# Altium PCB MCORD_MCX_SAS.PcbDoc
Units mil, origin at the board's own origin, x right, y up, seen from the top; angles counter-clockwise.
Board outline 9527.56 x 1968.5 mil, 4 copper layers (TOP, G1, PWR, BOT), stack 61.811 mil thick; 35 components, 33 nets, 222 pads, 49 vias.
Unrouted connection lines stored in the file: 1.
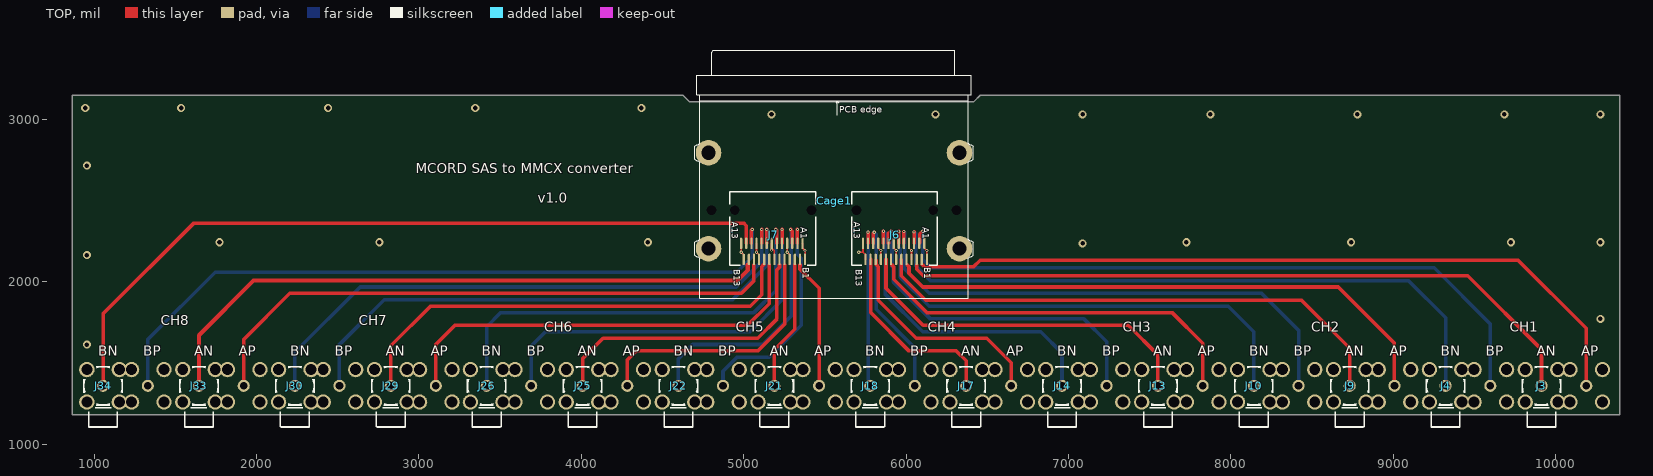
[diagram p0: TOP view]
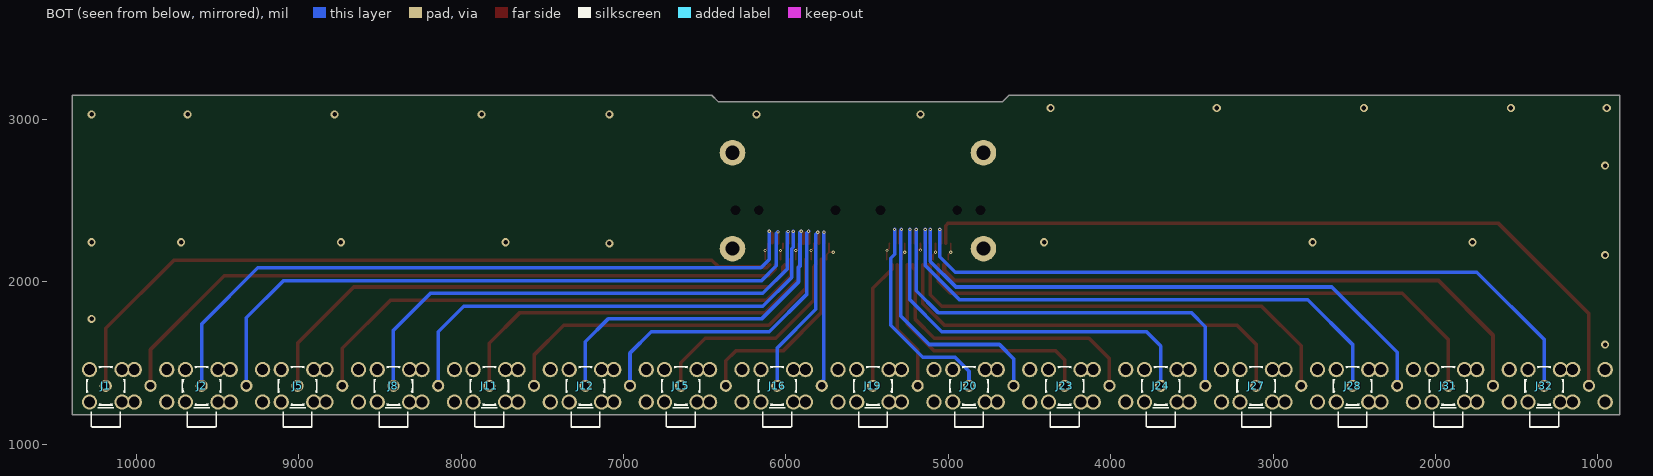
[diagram p1: BOT view, seen from below]
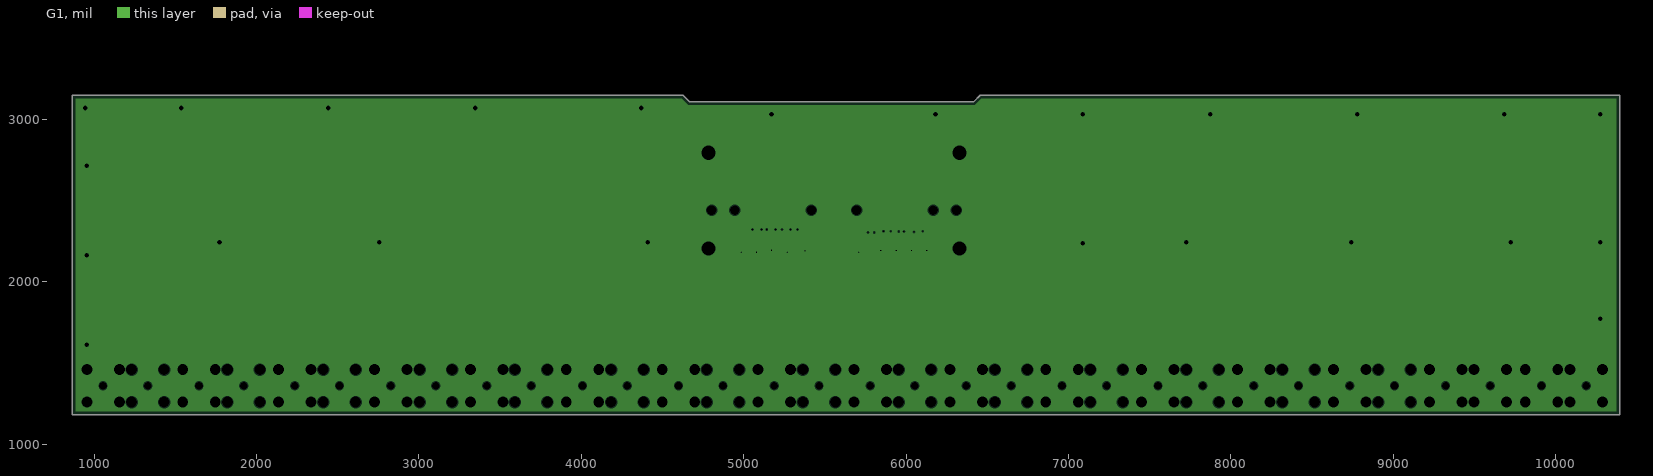
[diagram p2: G1, clearances drawn from the general rule]
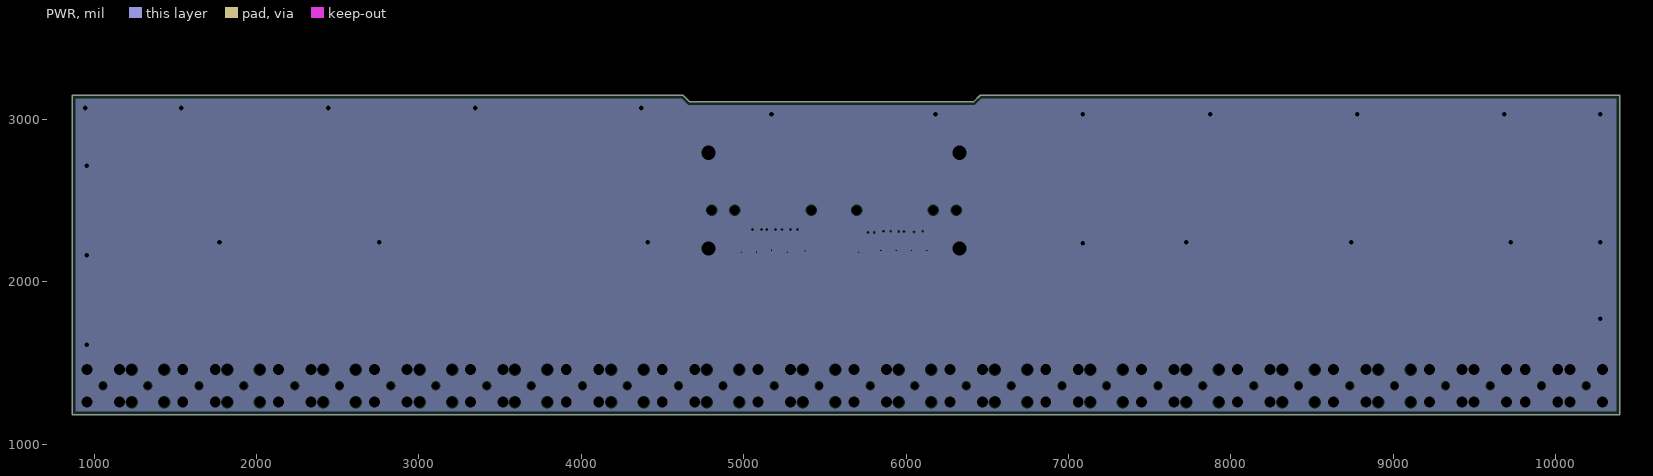
[diagram p3: PWR, clearances drawn from the general rule]
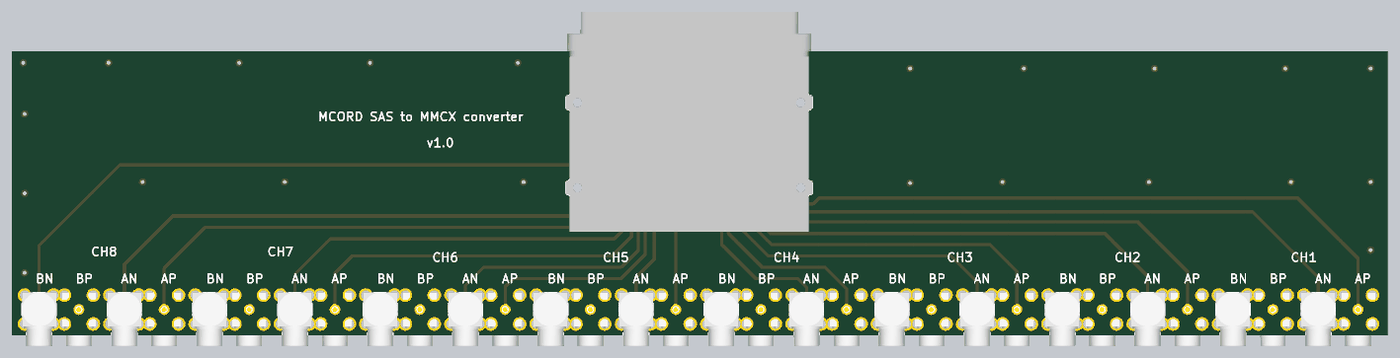
[diagram p4: 3D render of the assembled board from above, using the file's embedded part models]
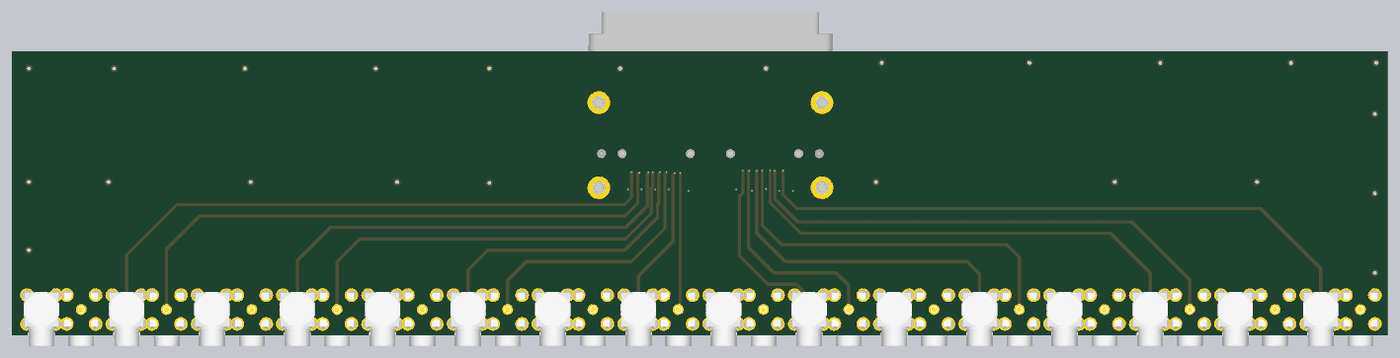
[diagram p5: 3D render of the assembled board from below, using the file's embedded part models]

## Layer stack, top to bottom
TopSolder: solder mask 0.394, Solder Resist, Dk 3.5
TOP: signal copper 1.378
Dielectric1: prepreg 14.1732, PP-015, Dk 4.3
G1: plane copper 1.378, net GND
Dielectric2: core 27.9528, Core-042, Dk 4.3
PWR: plane copper 1.378, net GND
Dielectric3: prepreg 14.1732, PP-015, Dk 4.3
BOT: signal copper 1.378
BottomSolder: solder mask 0.394, Solder Resist, Dk 3.5

## Board outline
866.14,1181.1 866.14,3149.61 4625.57,3149.61 4664.94,3110.24 6417.32,3110.24 6456.69,3149.61 10393.7,3149.61 10393.7,1181.1

## Design rules (kind name [scope] priority, off if disabled: settings)
AcuteAngle [All] p1: minimum=6.00000000000000E+0001 checktracksonly=FALSE
Clearance [All] p1: gap=5 ignorepadtopadclearanceinfootprint=FALSE
ComponentClearance [All] p1 off: gap=10 collisioncheckmode=3 verticalgap=10 showdistances=FALSE
DiffPairsRouting [All] p1: maxlimit=6 minlimit=6 mostfreqgap=6 toplayer_minwidth=10 toplayer_maxwidth=10 toplayer_prefwidth=10 bottomlayer_minwidth=10 bottomlayer_maxwidth=10 bottomlayer_prefwidth=10 impedanceprofiledriven=TRUE impedanceprofileid={2FF3B780-2FCA-48EA-8E76-FBA2A5B136F6} impedanceprofilevalue=100.000000 maxuncoupledlength=500
Height [All] p1 off: minheight=0 maxheight=5000 prefheight=500
HoleSize [All] p1: absolutevalues=TRUE maxlimit=157.48 minlimit=1 maxpercent=80.000 minpercent=20.000
MinimumSolderMaskSliver [All] p1: minsoldermaskwidth=1
PlaneClearance [All] p1: clearance=5
PlaneConnect [All] p1: pad.planeconnectstyle=Relief pad.reliefexpansion=5 pad.reliefentries=4 pad.reliefconductorwidth=5 pad.reliefairgap=5 via.planeconnectstyle=Direct via.reliefexpansion=20 via.reliefentries=4 via.reliefconductorwidth=10 via.reliefairgap=10
PolygonConnect [All] p1: thpad.connectstyle=Relief thpad.reliefconductorwidth=5 thpad.reliefentries=4 thpad.polygonreliefangle="90 Angle" thpad.airgapwidth=5 smdpad.connectstyle=Relief smdpad.reliefconductorwidth=5 smdpad.reliefentries=4 smdpad.polygonreliefangle="90 Angle" smdpad.airgapwidth=5 via.connectstyle=Direct via.reliefconductorwidth=10 via.reliefentries=4 via.polygonreliefangle="90 Angle" via.airgapwidth=10
RoomDefinition MCORD_MCX_SAS [InComponentClass('MCORD_MCX_SAS')] p1 off: confinementstyle=ConfineIn formatcopy=TRUE lockcomponents=FALSE outline 2440.94,2007.87 2777.17,2007.87 2777.17,2244.09 2440.94,2244.09
RoutingVias [All] p1: holewidth=7.87 width=19.68 viastyle="Through Hole" minholewidth=7.87 minwidth=19.68 maxholewidth=28 maxwidth=50 viatemplateguid#1={D7F82552-14B3-4ECA-8CF9-3B28E7AADB91} viatemplatename#1=v50h20m0mx0
SilkToSilkClearance [All] p1: silktosilkclearance=0
SilkToSolderMaskClearance [IsPad] p1: minsilkscreentomaskgap=0 clearancetoexposedcopper=TRUE
SolderMaskExpansion [All] p1: expansion=2 istentingtop=FALSE
Width "Width 50R" [InNetClass('50R')] p1: maxlimit=26 minlimit=22 preferedwidth=25.94 impedanceprofiledriven=TRUE impedanceprofileid={70AC7992-8569-4CAB-A508-E77900784CB2} impedanceprofilevalue=50.000000 minimp=50.000000 maximp=50.000000 favimp=50.000000
Width [All] p2: maxlimit=100 minlimit=6 preferedwidth=10
21 further rules are at their usual default settings.

## Classes and differential pairs
net class 50R: OUTA_N1 OUTA_N2 OUTA_N3 OUTA_N4 OUTA_N5 OUTA_N6 OUTA_N7 OUTA_N8 OUTA_P1 OUTA_P2 OUTA_P3 OUTA_P4 OUTA_P5 OUTA_P6 OUTA_P7 OUTA_P8 OUTB_N1 OUTB_N2 OUTB_N3 OUTB_N4 OUTB_N5 OUTB_N6 OUTB_N7 OUTB_N8 OUTB_P1 OUTB_P2 OUTB_P3 OUTB_P4 OUTB_P5 OUTB_P6 OUTB_P7 OUTB_P8

## Components (designator, comment, footprint, x,y, rotation, side; value= is the part's Value field where it differs from the comment)
Cage1 "Mini-SAS" TYCO_1888321-2 4802.17,2440.94 r270 top
J1 "MCX" AMPHENOL_919-383J-51A 10188.61,1359.84 r270 bottom
J2 "MCX" AMPHENOL_919-383J-51A 9598.06,1359.84 r270 bottom
J3 "MCX" AMPHENOL_919-383J-51A 9913.02,1359.84 r270 top
J4 "MCX" AMPHENOL_919-383J-51A 9322.47,1359.84 r270 top
J5 "MCX" AMPHENOL_919-383J-51A 9007.51,1359.84 r270 bottom
J6 "Mini-SAS" TYCO_1761987-7 5694.95,2440.94 r270 top
J7 "Mini-SAS" TYCO_1761987-7 4944.88,2440.94 r270 top
J8 "MCX" AMPHENOL_919-383J-51A 8416.96,1359.84 r270 bottom
J9 "MCX" AMPHENOL_919-383J-51A 8731.92,1359.84 r270 top
J10 "MCX" AMPHENOL_919-383J-51A 8141.37,1359.84 r270 top
J11 "MCX" AMPHENOL_919-383J-51A 7826.41,1359.84 r270 bottom
J12 "MCX" AMPHENOL_919-383J-51A 7234.74,1359.84 r270 bottom
J13 "MCX" AMPHENOL_919-383J-51A 7550.82,1359.84 r270 top
J14 "MCX" AMPHENOL_919-383J-51A 6960.27,1359.84 r270 top
J15 "MCX" AMPHENOL_919-383J-51A 6647.33,1359.84 r270 bottom
J16 "MCX" AMPHENOL_919-383J-51A 6053.63,1359.84 r270 bottom
J17 "MCX" AMPHENOL_919-383J-51A 6369.72,1359.84 r270 top
J18 "MCX" AMPHENOL_919-383J-51A 5779.17,1359.84 r270 top
J19 "MCX" AMPHENOL_919-383J-51A 5464.2,1359.84 r270 bottom
J20 "MCX" AMPHENOL_919-383J-51A 4872.53,1359.84 r270 bottom
J21 "MCX" AMPHENOL_919-383J-51A 5188.61,1359.84 r270 top
J22 "MCX" AMPHENOL_919-383J-51A 4598.06,1359.84 r270 top
J23 "MCX" AMPHENOL_919-383J-51A 4283.1,1359.84 r270 bottom
J24 "MCX" AMPHENOL_919-383J-51A 3691.43,1359.84 r270 bottom
J25 "MCX" AMPHENOL_919-383J-51A 4007.51,1359.84 r270 top
J26 "MCX" AMPHENOL_919-383J-51A 3416.96,1359.84 r270 top
J27 "MCX" AMPHENOL_919-383J-51A 3104.03,1359.84 r270 bottom
J28 "MCX" AMPHENOL_919-383J-51A 2510.33,1359.84 r270 bottom
J29 "MCX" AMPHENOL_919-383J-51A 2826.41,1359.84 r270 top
J30 "MCX" AMPHENOL_919-383J-51A 2235.86,1359.84 r270 top
J31 "MCX" AMPHENOL_919-383J-51A 1920.9,1359.84 r270 bottom
J32 "MCX" AMPHENOL_919-383J-51A 1330.35,1359.84 r270 bottom
J33 "MCX" AMPHENOL_919-383J-51A 1645.31,1359.84 r270 top
J34 "MCX" AMPHENOL_919-383J-51A 1054.76,1359.84 r270 top

## Footprints (in the part's own frame and the unit in brackets; to place one, negate y for a bottom-side part, rotate by r counter-clockwise, add the part's x,y. Pads: shape width x height; smd on the part's side, far side on the other; paste and mask are expansions set on the pad)
AMPHENOL_919-383J-51A [mm] "50 Ohm, RF Connector, MCX Right Angle PCB Receptacle Jack"
  round 1.9 hole 1.2: 1(0,0)
  round 2.4 hole 1.7: 2(-2.54,-2.54) 2(-2.54,2.54) 2(2.54,-2.54) 2(2.54,2.54)
  silkscreen extent -3,-3 6.5,3, body extent -3,-3 6.5,3, height 6
TYCO_1761987-7 [mm] "20 Position, Pitch 0.8mm SAS Receptacle"
  rrect100% 1.8x0.35 smd: A1(5.18,10.6) A2(5.18,9.8) A3(5.18,9) A4(5.18,8.2) A5(5.18,7.4) A6(5.18,6.6) A7(5.18,5.8) A8(5.18,5) A9(5.18,4.2) A10(5.18,3.4) A11(5.18,2.6) A12(5.18,1.8) A13(5.18,1) B1(7.69,11) B2(7.69,10.2) B3(7.69,9.4) B4(7.69,8.6) B5(7.69,7.8) B6(7.69,7) B7(7.69,6.2) B8(7.69,5.4) B9(7.69,4.6) B10(7.69,3.8) B11(7.69,3) B12(7.69,2.2) B13(7.69,1.4)
  round 0.5 hole 1.55 unplated mask+0.525: MTG1(0,12) MTG2(0,0)
  silkscreen extent -2.9,-0.75 8.6,12.65, body extent -2.9,-0.7 8.94,12.7, height 5.35
TYCO_1888321-2 [mm] "SAS 2x1 Cage"
  round 4 hole 2.2: 1(-9,38.775) 2(-9,-0.475) 3(6,38.775) 4(6,-0.475)
  round 1 hole 1.55 unplated: 7(0,38.3) 8(0,0)
  silkscreen extent -25,-2.6 13.75,40.9, body extent -25,-2.6 13.75,40.9, height 9.42

## Part data
Cage1: library part TYCO_1888321-2, "Mini-SAS Cage (6Pins)", Manufacturer="TYCO ELECTRONICS", Manufacturer Part Number=1888321-2, Author="CERN DEM BC", ComponentHeight=8.63mm, Component Type=Standard, CreateDate=04.04.2019, Family=Mini-SAS, HelpURL=\\cern.ch\dfs\Applications\Altium\Datasheets\TYCO_1888321-2.pdf, LatestRevisionDate=04.04.2019, Mounted=Yes, Part Description="Through Hole Dual Port EVERCLEAR Mini-SAS Cage", Part Number=TYCO_1888321-2, Pin Count=10, PressFit=No, Sense=No, SMD=No, Socket=No, Status=None
J1 J2 J3 J4 J5 J8 J9 J10 J11 J12 J13 J14 J15 J16 J17 J18 J19 J20 J21 J22 J23 J24 J25 J26 J27 J28 J29 J30 J31 J32 J33 J34: library part AMPHENOL_919-383J-51A, Manufacturer=AMPHENOL, Manufacturer Part Number=919-383J-51A, Author="CERN DEM BC", Component Type=Standard, ComponentHeight=6mm, CreateDate=31.01.2019, Family=MCX, HelpURL=\\cern.ch\dfs\Applications\Altium\Datasheets\AMPHENOL_919-383J-51A.pdf, LatestRevisionDate=31.01.2019, Mounted=Yes, Part Description="50 Ohm, RF Connector, MCX Right Angle PCB Receptacle Jack", Part Number=AMPHENOL_919-383J-51A, Pin Count=5, PressFit=No, Sense=No, SMD=No, Socket=No, Status=None
J6 J7: library part TYCO_1761987-7, "26 Position Mini-Sas Connector (Quad Small Form-Factor SFF-8088)", Manufacturer="TYCO ELECTRONICS", Manufacturer Part Number=1761987-7, Author="CERN DEM MR", ComponentHeight=5.55mm, Component Type=Standard, CreateDate=24.04.2019, Family=Mini-SAS, HelpURL=\\cern.ch\dfs\Applications\Altium\Datasheets\TYCO_1761987-7.pdf, LatestRevisionDate=24.04.2019, Mounted=Yes, Part Description="Surface Mount EVERCLEAR Mini-SAS Right Angle Receptacle (Quad Small Form-Factor SFF-8088)", Part Number=TYCO_1761987-7, Pin Count=26, PressFit=No, Sense=No, SMD=Yes, Socket=No, Status=None

## Via types
v1: diameter 19.68, hole 7.87, TOP to BOT, tented both sides, 25 vias
v2: diameter 50, hole 28, TOP to BOT, tented both sides, 24 vias

## Nets (pads, with @x,y where several pads share a name; then routed paths per layer and width w, separated by ;. In a path a pad name is that pad's centre, name@x,y a point inside that pad or via, vN(x,y) a via of type N, cw(c..) or ccw(c..) an arc to the next point about the centre after c; other vN are vias at no path point)
GND: Cage1.1 Cage1.2 Cage1.3 Cage1.4 J1.2 J2.2 J3.2 J4.2 J6.A1 J6.A4 J6.A7 J6.A10 J6.A13 J6.B1 J6.B4 J6.B7 J6.B10 J6.B13 J7.A1 J7.A4 J7.A7 J7.A10 J7.A13 J7.B1 J7.B4 J7.B7 J7.B10 J7.B13 J9.2 J10.2 J13.2 J14.2 J17.2 J18.2 J21.2 J22.2 J25.2 J26.2 J29.2 J30.2 J33.2 J34.2 | length 1087.1
  TOP w10: J7.A13 v1(4984.25,2182.48) 5000,2166.73 J7.B13 ; J7.A10 v1(5078.74,2182.48) 5094.49,2166.73 J7.B10 ; v1(5171.01,2195.61) 5171.01,2234.79 J7.A7 ; J7.A7@5177.14,2204.36 5188.98,2192.53 J7.B7 ; J7.A4 v1(5267.72,2182.48) 5283.46,2166.73 J7.B4 ; J7.A1 5363.35,2235.86 5363.35,2207.14 v1(5377.95,2192.53) J7.B1 ; v1(5708.66,2182.48) 5734.32,2182.48 ; J6.A13 5734.32,2182.48 ; J6.B13 5750.07,2166.73 5734.32,2182.48 ; J6.A10 5828.81,2208.46 v1(5844.56,2192.71) J6.B10 ; J6.A7 5923.3,2208.46 v1(5939.05,2192.71) J6.B7 ; J6.A4 6017.79,2208.46 v1(6033.53,2192.71) J6.B4 ; J6.A1 6112.27,2208.46 v1(6128.02,2192.71) J6.B1
  other v2: 954.76,1614.17 10275.59,1771.65 954.76,2165.35 7086.61,2237.01 1771.65,2244.09 2755.91,2244.09 4409.45,2244.09 7726.41,2244.09 8740.16,2244.09 9724.41,2244.09 10275.59,2244.09 954.76,2716.54 5171.01,3031.5 6181.1,3031.5 7086.61,3031.5 7874.02,3031.5 8779.53,3031.5 9685.04,3031.5 10275.59,3031.5 944.88,3070.87 1535.43,3070.87 2440.94,3070.87 3346.46,3070.87 4370.08,3070.87
OUTA_N1: J3.1 J6.B3 | length 4303.3
  TOP w22: J6.B3@6065.03,2105.53 6065.03,2078.74 6106.16,2037.61 9458.46,2037.61 9913.02,1583.04 J3.1
OUTA_N2: J6.B6 J9.1 | length 3278.3
  TOP w22: J6.B6 5970.54,2037.61 6120.42,1887.73 8435.47,1887.73 8731.92,1591.28 J9.1
OUTA_N3: J6.B9 J13.1 | length 2212.5
  TOP w22: J6.B9 5876.05,1960.63 6104.4,1732.28 7368.41,1732.28 7550.82,1549.88 J13.1
OUTA_N4: J6.B12 J17.1 | length 1192.6
  TOP w22: J6.B12 5781.56,1811.02 6017.79,1574.8 6309.09,1574.8 6369.72,1514.17 J17.1
OUTA_N5: J7.B3 J21.1 | length 798
  TOP w22: J21.1 5188.61,1582.32 5314.96,1708.66 J7.B3@5314.96,2105.53
OUTA_N6: J7.B6 J25.1 | length 1806.2
  TOP w22: J25.1 4007.51,1527.2 4133.86,1653.54 5086.61,1653.54 5204.72,1771.65 5204.72,2074.48 5220.47,2090.22 J7.B6@5220.47,2105.53
OUTA_N7: J7.B9 J29.1 | length 2849.6
  TOP w22: J29.1 2826.41,1605.94 3070.87,1850.39 5039.37,1850.39 5110.24,1921.26 5110.24,2093.02 5117.38,2100.16 5117.38,2101.04 J7.B9@5121.87,2105.53
OUTA_N8: J7.B12 J33.1 | length 3890.9
  TOP w26: J33.1 1645.31,1671.65 1981.53,2007.87 4960.63,2007.87 5025.39,2072.63 5025.39,2105.53
OUTA_P1: J1.1 J6.B2 | length 4643.3
  TOP w22: J6.B2@6100.64,2104.66 6118.54,2086.75 6137.5,2086.75 6143.77,2093.02 6415.64,2093.02 6456.69,2134.08 9768.71,2134.08 10188.61,1714.17 J1.1
OUTA_P2: J5.1 J6.B5 | length 3487.8
  TOP w22: J6.B5@6006.15,2105.53 6010.64,2101.04 6010.64,2100.16 6017.79,2093.02 6017.79,2053.35 6102.64,1968.5 8661.42,1968.5 9007.51,1622.41 J5.1
OUTA_P3: J6.B8 J11.1 | length 2423.2
  TOP w22: J6.B8@5911.66,2105.53 5916.16,2101.04 5916.16,2100.16 5923.3,2093.02 5923.3,2015.75 6128.02,1811.02 7637.8,1811.02 7826.41,1622.41 J11.1
OUTA_P4: J6.B11 J15.1 | length 1371.8
  TOP w22: J6.B11@5817.17,2134.08 5817.17,2105.53 5821.67,2101.04 5821.67,2100.16 5828.81,2093.02 5828.81,1887.73 6062.99,1653.54 6496.06,1653.54 6647.33,1502.27 J15.1
OUTA_P5: J7.B2 J19.1 | length 793.6
  TOP w22: J7.B2@5346.46,2104.66 5346.46,2078.74 5464.2,1960.99 J19.1
OUTA_P6: J7.B5 J23.1 | length 1585
  TOP w22: J23.1 4283.1,1518.96 4338.94,1574.8 5086.61,1574.8 5251.97,1740.16 J7.B5@5251.97,2105.53
OUTA_P7: J7.B8 J27.1 | length 2651.5
  TOP w22: J27.1 3104.03,1614.17 3222.14,1732.28 5023.62,1732.28 5157.48,1866.14 J7.B8@5157.48,2105.53
OUTA_P8: J7.B11 J31.1 | length 3676.4
  TOP w22: J31.1 1920.9,1645.31 2204.72,1929.13 4986.02,1929.13 5062.99,2006.11 J7.B11@5062.99,2105.53
OUTB_N1: J4.1 J6.A3 | length 4099.3
  TOP w22: J6.A3 v1(6049.28,2307.88)
  BOT w22: v1(6049.28,2307.88) 6059.38,2297.79 6059.38,2098.98 6150.48,2007.87 9094.49,2007.87 9322.47,1779.89 J4.1
OUTB_N2: J6.A6 J10.1 | length 3010.1
  TOP w22: J6.A6 v1(5954.79,2311.08)
  BOT w22: v1(5954.79,2311.08) 5954.79,2213.51 5964.89,2203.42 5964.89,2027.24 6141.73,1850.39 7983.89,1850.39 8141.37,1692.91 J10.1
OUTB_N3: J6.A9 J14.1 | length 1908.6
  TOP w22: J6.A9 v1(5860.3,2312.05)
  BOT w22: v1(5860.3,2312.05) 5870.4,2301.96 5870.4,1924.88 6102.36,1692.91 6829.13,1692.91 6960.27,1561.78 J14.1
OUTB_N4: J6.A12 J18.1 | length 1018.8
  TOP w22: J6.A12 v1(5765.82,2305.05)
  BOT w22: v1(5765.82,2305.05) 5765.82,1399.13 5769.06,1395.89 5769.06,1369.95 J18.1
OUTB_N5: J7.A3 J22.1 | length 1603.9
  TOP w22: v1(5288.61,2322.83) 5299.21,2312.24 J7.A3
  BOT w22: J22.1 4606.3,1368.08 4598.06,1376.31 4598.06,1527.2 4685.04,1614.17 5118.11,1614.17 5293.56,1789.62 5293.56,2317.89 v1(5288.61,2322.83)
OUTB_N6: J7.A6 J26.1 | length 2702.6
  TOP w22: v1(5196.85,2322.83) 5204.72,2314.96 J7.A6
  BOT w22: J26.1 3416.96,1724.05 3503.94,1811.02 5062.99,1811.02 5196.85,1944.88 v1(5196.85,2322.83)
OUTB_N7: J7.A9 J30.1 | length 3595.5
  TOP w22: J7.A9 v1(5110.24,2322.83)
  BOT w22: J30.1 2235.86,1566.57 2637.8,1968.5 4952.76,1968.5 5110.24,2125.98 v1(5110.24,2322.83)
OUTB_N8: J7.A12 J34.1 | length 4751.6
  TOP w22: J34.1 1054.76,1802.79 1614.17,2362.2 5000,2362.2 5015.75,2346.46 J7.A12
OUTB_P1: J2.1 J6.A2 | length 4293.5
  TOP w22: J6.A2@6084.89,2241.12 6084.89,2294.58 v1(6102.36,2312.05)
  BOT w22: v1(6102.36,2312.05) 6102.18,2311.87 6102.18,2138.07 6153.63,2086.61 9251.97,2086.61 9598.06,1740.52 J2.1
OUTB_P2: J6.A5 J8.1 | length 3229.2
  TOP w22: J6.A5 v1(5986.29,2310.02)
  BOT w22: v1(5986.29,2310.02) 5991.89,2304.42 5991.89,2078.98 6141.73,1929.13 8188.98,1929.13 8416.96,1701.15 J8.1
OUTB_P3: J6.A8 J12.1 | length 2137
  TOP w22: J6.A8 5891.8,2298.34 v1(5905.51,2312.05)
  BOT w22: v1(5905.51,2312.05) 5913.2,2304.36 5913.2,2097.77 5922.6,2088.37 5922.6,1999.54 6150.48,1771.65 7095.37,1771.65 7234.74,1632.28 J12.1
OUTB_P4: J6.A11 J16.1 | length 1119.4
  TOP w22: J6.A11 5797.31,2298.36 v1(5804,2305.05)
  BOT w22: v1(5804,2305.05) 5815.39,2293.66 5815.39,1831.16 6053.63,1592.91 J16.1
OUTB_P5: J7.A2 J20.1 | length 1374.6
  TOP w22: J7.A2 v1(5330.71,2322.83)
  BOT w22: J20.1 4872.53,1449.28 4958.68,1535.43 5157.48,1535.43 5354.33,1732.28 5354.33,2145.67 5330.71,2169.29 v1(5330.71,2322.83)
OUTB_P6: J7.A5 J24.1 | length 2426.7
  TOP w22: J7.A5 v1(5236.22,2322.83)
  BOT w22: J24.1 3691.43,1604.81 3779.53,1692.91 5039.37,1692.91 5236.22,1889.76 v1(5236.22,2322.83)
OUTB_P7: J7.A8 J28.1 | length 3395.4
  TOP w22: J7.A8 v1(5141.73,2322.83)
  BOT w22: J28.1 2510.33,1614.17 2785.92,1889.76 4931.13,1889.76 5141.73,2100.36 v1(5141.73,2322.83)
OUTB_P8: J7.A11 J32.1 | length 4475
  TOP w22: J7.A11 5047.24,2317.18 v1(5052.9,2322.83)
  BOT w22: J32.1 1330.35,1645.31 1745.17,2060.13 4957.77,2060.13 5052.9,2155.26 v1(5052.9,2322.83)
pads on no net: Cage1.7 Cage1.8 J5.2 J6.MTG1 J6.MTG2 J7.MTG1 J7.MTG2 J8.2 J11.2 J12.2 J15.2 J16.2 J19.2 J20.2 J23.2 J24.2 J27.2 J28.2 J31.2 J32.2

## Polygon pours and split planes (outlines as drawn)
GND on G1 (split plane): 10373.6,1201.2 886.24,1201.2 886.24,3129.51 4617.25,3129.51 4650.73,3096.03 4653.78,3093.53 4657.25,3091.67 4661.02,3090.53 4664.94,3090.14 6417.32,3090.14 6421.24,3090.53 6425.01,3091.67 6428.49,3093.53 6431.53,3096.03 6465.02,3129.51 10373.6,3129.51
GND on PWR (split plane): 10373.6,1201.2 886.24,1201.2 886.24,3129.51 4617.25,3129.51 4650.73,3096.03 4653.78,3093.53 4657.25,3091.67 4661.02,3090.53 4664.94,3090.14 6417.32,3090.14 6421.24,3090.53 6425.01,3091.67 6428.49,3093.53 6431.53,3096.03 6465.02,3129.51 10373.6,3129.51

## Silkscreen, mask and mechanical layers (free items; w line width, h text height)
TopOverlay:
  text "MCORD SAS to MMCX converter" at 2980.32,2669.29 h60
  text "v1.0" at 3732.28,2488.19 h60
  text "CH8" at 1409.09,1732.28 h60
  text "CH7" at 2629.56,1732.28 h60
  text "CH6" at 3771.29,1692.91 h60
  text "CH5" at 4952.39,1692.91 h60
  text "CH4" at 6133.5,1692.91 h60
  text "CH3" at 7334.74,1692.91 h60
  text "CH2" at 8495.7,1692.91 h60
  text "CH1" at 9716.17,1692.91 h60
  text "BN" at 1025.39,1545.43 h60
  text "BP" at 1300.98,1545.43 h60
  text "AN" at 1615.94,1545.43 h60
  text "AP" at 1891.53,1545.43 h60
  text "BN" at 2206.49,1545.43 h60
  text "BP" at 2482.08,1545.43 h60
  text "AN" at 2797.04,1545.43 h60
  text "AP" at 3072.63,1545.43 h60
  text "BN" at 3387.59,1545.43 h60
  text "BP" at 3663.18,1545.43 h60
  text "AN" at 3978.14,1545.43 h60
  text "AP" at 4253.73,1545.43 h60
  text "BN" at 4568.69,1545.43 h60
  text "BP" at 4844.28,1545.43 h60
  text "AN" at 5159.24,1545.43 h60
  text "AP" at 5434.83,1545.43 h60
  text "BN" at 5749.8,1545.43 h60
  text "BP" at 6025.39,1545.43 h60
  text "AN" at 6340.35,1545.43 h60
  text "AP" at 6615.94,1545.43 h60
  text "BN" at 6930.9,1545.43 h60
  text "BP" at 7206.49,1545.43 h60
  text "AN" at 7521.45,1545.43 h60
  text "AP" at 7797.04,1545.43 h60
  text "BN" at 8112,1545.43 h60
  text "BP" at 8387.59,1545.43 h60
  text "AN" at 8702.55,1545.43 h60
  text "AP" at 8978.14,1545.43 h60
  text "BN" at 9293.1,1545.43 h60
  text "BP" at 9568.69,1545.43 h60
  text "AN" at 9883.65,1545.43 h60
  text "AP" at 10159.24,1545.43 h60
Mechanical 1:
  lines w3.94: 866.14,1181.1 866.14,3149.61 2714.17,3149.61 4625.57,3149.61 4664.94,3110.24 5099.82,3110.24 6417.32,3110.24 6456.69,3149.61 10393.7,3149.61 10393.7,1181.1 866.14,1181.1
Mechanical 2:
  lines w3.94: 2283.46,3267.72 8543.31,3267.72

## Text inside footprints (layer, text, board x,y; h text height)
Cage1: TopOverlay "PCB edge" at 5587.71,3040.02 h39.37; Mechanical 14 "A1" at 5355.31,2335.43 h39.37 r270; Mechanical 14 "A13" at 4958.66,2384.64 h39.37 r270; Mechanical 14 "B13" at 4939.88,2080.94 h39.37 r270; Mechanical 14 "B1" at 5362.2,2089.37 h39.37 r270; Mechanical 14 "A1" at 6105.38,2335.43 h39.37 r270; Mechanical 14 "A13" at 5708.73,2384.64 h39.37 r270; Mechanical 14 "B13" at 5689.95,2080.94 h39.37 r270; Mechanical 14 "B1" at 6112.27,2089.37 h39.37 r270
J6: TopOverlay "B1" at 6112.27,2088.88 h39.37 r270; TopOverlay "B13" at 5689.05,2079.04 h39.37 r270; TopOverlay "A13" at 5676.95,2369.94 h39.37 r270; TopOverlay "A1" at 6102.43,2335.43 h39.37 r270; Mechanical 14 "A1" at 6105.38,2335.43 h39.37 r270; Mechanical 14 "A13" at 5708.73,2384.64 h39.37 r270; Mechanical 14 "B13" at 5689.95,2080.94 h39.37 r270; Mechanical 14 "B1" at 6112.27,2089.37 h39.37 r270
J7: TopOverlay "B1" at 5362.2,2088.88 h39.37 r270; TopOverlay "B13" at 4938.98,2079.04 h39.37 r270; TopOverlay "A13" at 4926.88,2369.94 h39.37 r270; TopOverlay "A1" at 5352.36,2335.43 h39.37 r270; Mechanical 14 "A1" at 5355.31,2335.43 h39.37 r270; Mechanical 14 "A13" at 4958.66,2384.64 h39.37 r270; Mechanical 14 "B13" at 4939.88,2080.94 h39.37 r270; Mechanical 14 "B1" at 5362.2,2089.37 h39.37 r270